# EAGLE board b4 (EAGLE 8.2.1)
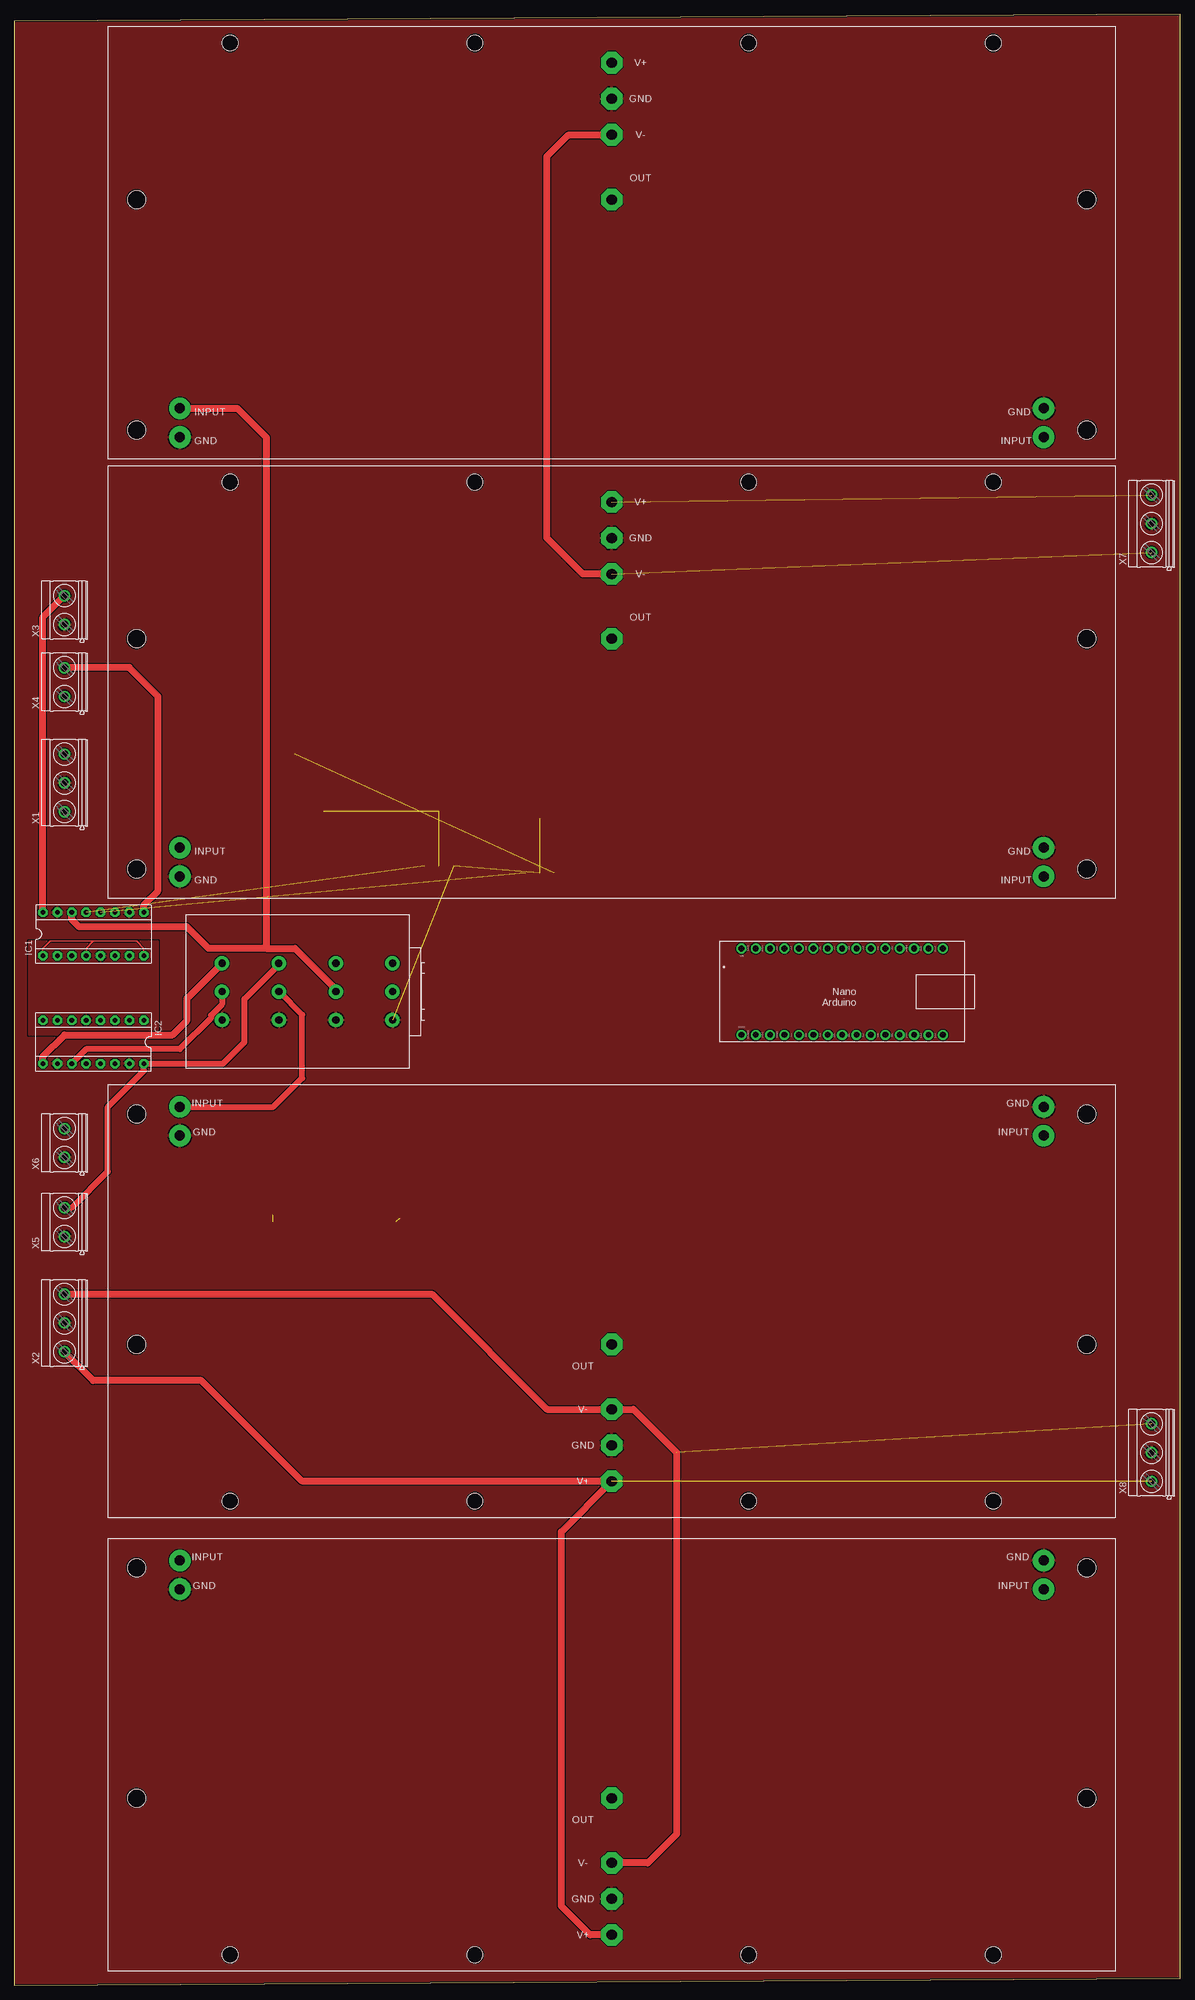
[diagram p0: board, top side]
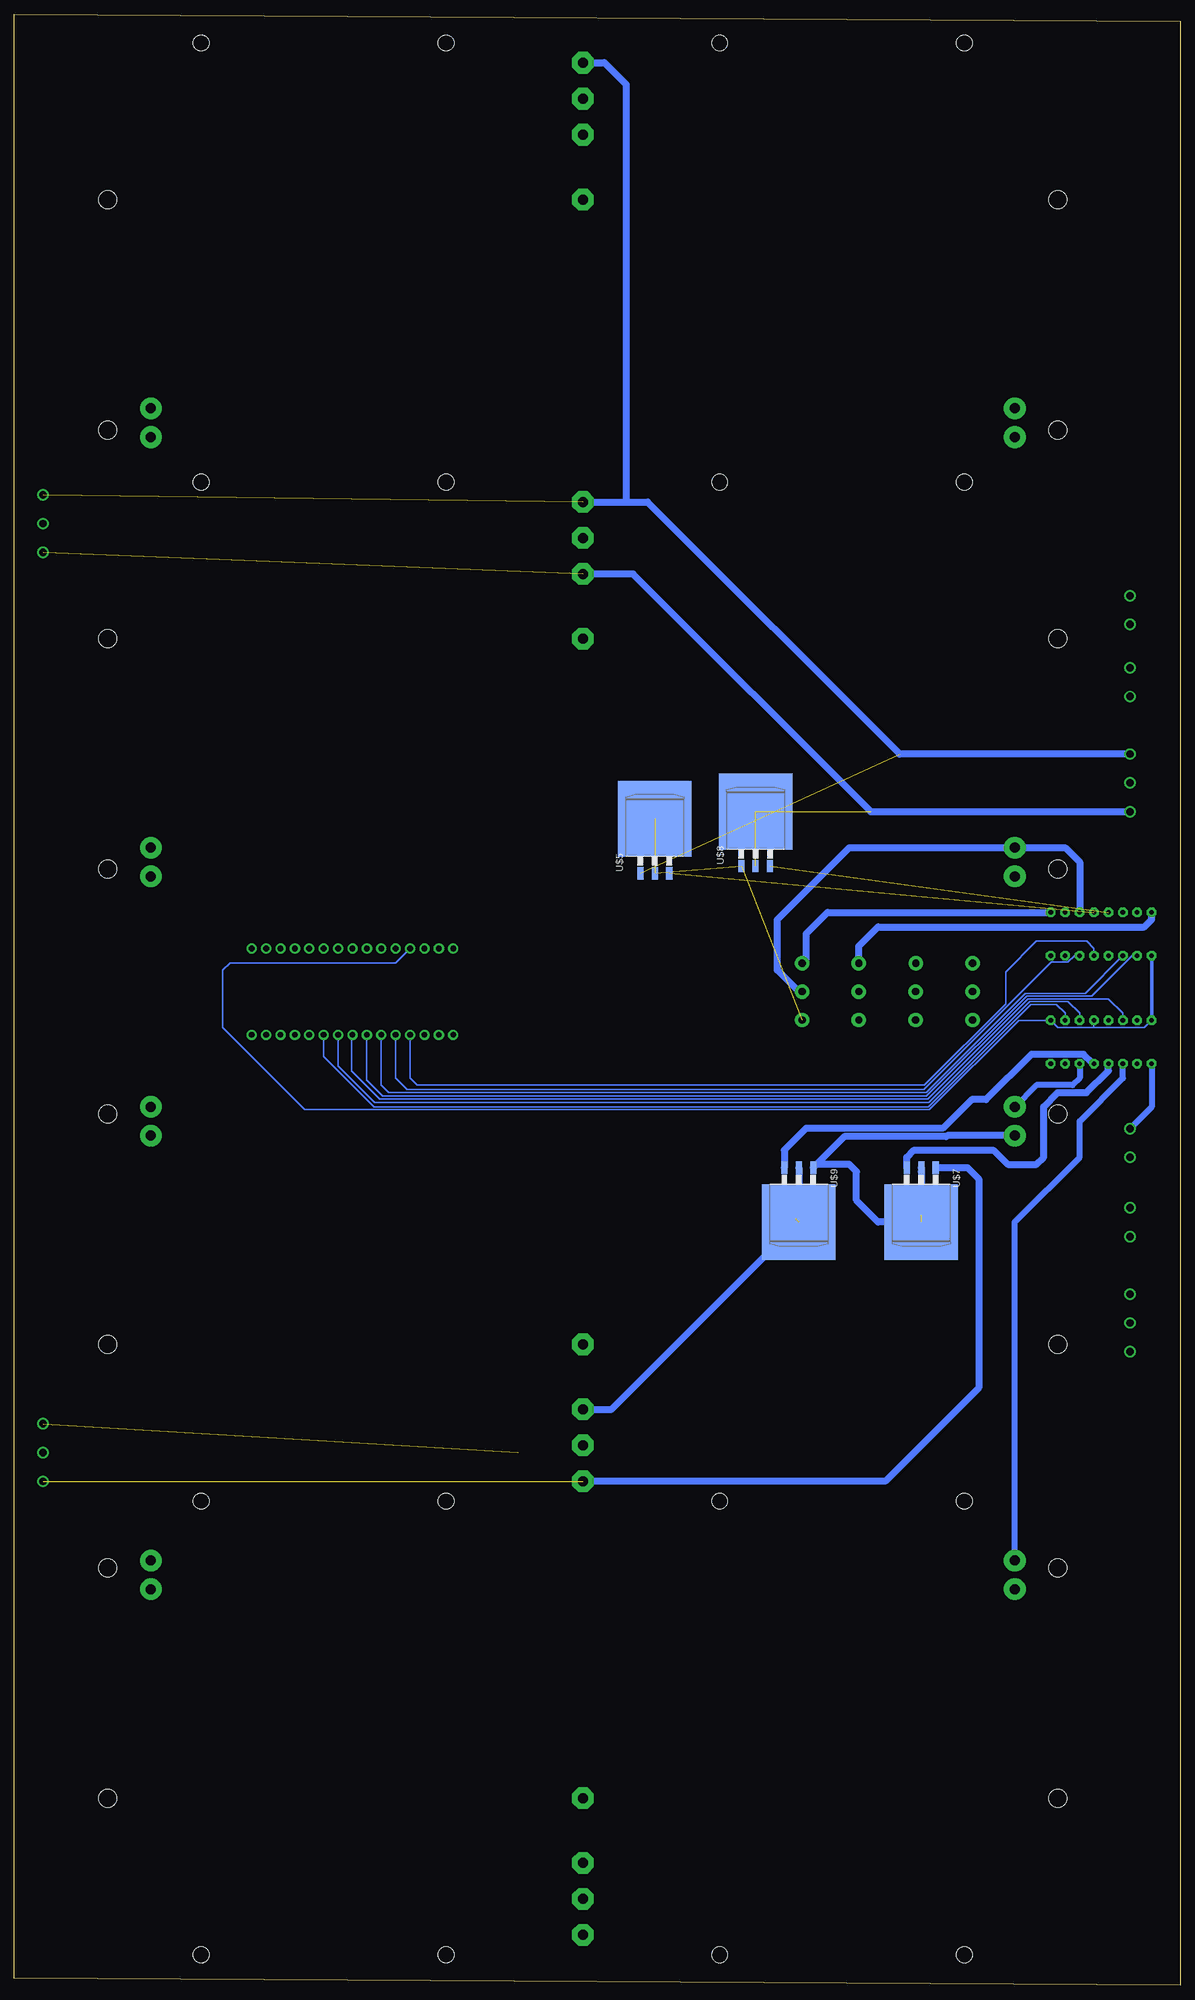
[diagram p1: board, bottom side, seen from below]

Size 205.72 x 347.65 mm. Coordinates in mm from the lower left corner, seen from the top.
Outline: 0,0 205.72,1.27 205.72,347.65 0,346.38 0,0
Copper layers (1*16): Top 0.035mm / dielectric 1.5mm / Bottom 0.035mm
Design rules "default": minimum track width 6mil, minimum drill 0.3mm, track to track 7mil, track to pad 7mil, pad to pad 7mil, via to via 7mil, smd to smd 7mil, copper to edge 8mil, drill to drill 8mil, minimum pad ring 6mil, minimum via ring 6mil, stop-mask expansion 4mil, vias tented up to drill 0mil, thermal gap 10mil

## Footprints (pad centres in the part's own frame; a part is rotated, then mirrored left to right if it is on the bottom)
DIL16 = drill 0.813 pad 1.676 octagon: 1 -8.89,-3.81; 2 -6.35,-3.81; 3 -3.81,-3.81; 4 -1.27,-3.81; 5 1.27,-3.81; 6 3.81,-3.81; 7 6.35,-3.81; 8 8.89,-3.81; 9 8.89,3.81; 10 6.35,3.81; 11 3.81,3.81; 12 1.27,3.81; 13 -1.27,3.81; 14 -3.81,3.81; 15 -6.35,3.81; 16 -8.89,3.81
ARDUINO_NANO = drill 1.016 pad 1.778: 3V3 6.35,1.27; 5V 31.75,1.27; A0 11.43,1.27; A1 13.97,1.27; A2 16.51,1.27; A3 19.05,1.27; A4 21.59,1.27; A5 24.13,1.27; A6 26.67,1.27; A7 29.21,1.27; D2 29.21,16.51; D3 26.67,16.51; D4 24.13,16.51; D5 21.59,16.51; D6 19.05,16.51; D7 16.51,16.51; D8 13.97,16.51; D9 11.43,16.51; D10 8.89,16.51; D11 6.35,16.51; D12 3.81,16.51; D13 3.81,1.27; GND 31.75,16.51; GND. 36.83,1.27; REF 8.89,1.27; RST 34.29,16.51; RST. 34.29,1.27; RX1 36.83,16.51; TX1 39.37,16.51; VIN 39.37,1.27
B22 = drill 1.778 pad 3.81 octagon: GND 88.9,63.5; OUT 88.9,45.72; V+ 88.9,69.85; V- 88.9,57.15 | drill 1.778 pad 3.81: GND1 12.7,3.81; GND2 165.1,8.89; IN1 12.7,8.89; IN2 165.1,3.81 | hole 3.2: 5.08,5.08; 172.72,5.08; 5.08,45.72; 172.72,45.72 | hole 2.8: 21.59,73.343; 64.77,73.343; 156.21,73.343; 113.03,73.343
TO263-3 = smd 1.067 x 2.159: 1 -2.54,-5.791; 2 0,-5.791; 3 2.54,-5.791 | smd 12.95 x 13.34: TAB 0,3.81
RK274 = drill 1.27 pad 2.54: G1 5,15.93; G2 5,5.93; G3 5,-4.103; G4 5,-14.136; I1 -5,15.93; I2 -5,5.93; I3 -5,-4.136; I4 -5,-14.136; O1 0,15.93; O2 0,5.93; O3 0,-4.103; O4 0,-14.136
MKDSN1,5/3-5,08 = drill 1.3 pad 2: 1 -7.641,0.025; 2 -2.561,0.025; 3 2.519,0.025
MKDSN1,5/2-5,08 = drill 1.3 pad 2: 1 -2.561,0.025; 2 2.519,0.025

## Placement (x,y rotation side)
IC1  PGA2311P  [DIL16]  13.97,185.42 0 top
IC2  PGA2311P  [DIL16]  13.97,166.37 180 top
PCB1  ARDUINO_NANO  [ARDUINO_NANO]  167.64,184.15 180 top
U$1  B22  [B22]  194.31,78.74 180 top
U$2  B22  [B22]  194.31,158.75 180 top
U$3  B22  [B22]  16.51,191.77 0 top
U$4  B22  [B22]  16.51,269.24 0 top
U$5  MC78XX  [TO263-3]  92.71,201.93 0 bottom
U$6  ALPSRK274  [RK274]  50.8,175.26 270 top
U$7  MC78XX  [TO263-3]  45.72,138.43 180 bottom
U$8  MC79XX  [TO263-3]  74.93,203.2 0 bottom
U$9  MC79XX  [TO263-3]  67.31,138.43 180 bottom
X1  MKDSN1,5/3-5,08  [MKDSN1,5/3-5,08]  8.89,214.63 90 top
X2  MKDSN1,5/3-5,08  [MKDSN1,5/3-5,08]  8.89,119.38 90 top
X3  MKDSN1,5/2-5,08  [MKDSN1,5/2-5,08]  8.89,242.57 90 top
X4  MKDSN1,5/2-5,08  [MKDSN1,5/2-5,08]  8.89,229.87 90 top
X5  MKDSN1,5/2-5,08  [MKDSN1,5/2-5,08]  8.89,134.62 90 top
X6  MKDSN1,5/2-5,08  [MKDSN1,5/2-5,08]  8.89,148.59 90 top
X7  MKDSN1,5/3-5,08  [MKDSN1,5/3-5,08]  200.66,260.35 90 top
X8  MKDSN1,5/3-5,08  [MKDSN1,5/3-5,08]  200.66,96.52 90 top

## Library data of the parts
IC1 IC2 U$1-U$5 U$7-U$9 = Vwvwbg
PCB1 = E14_Arduino_revB
U$6 = audio-pots
X1-X8 = con-phoenix-508

## Nets
DGND: IC1.5 IC2.5 PCB1.GND
GND: IC1.10 IC1.15 IC2.10 IC2.15 U$1.GND U$1.GND1 U$1.GND2 U$2.GND U$2.GND1 U$2.GND2 U$3.GND U$3.GND1 U$3.GND2 U$4.GND U$4.GND1 U$4.GND2 U$5.2 U$5.TAB U$6.G1 U$6.G2 U$6.G3 U$6.G4 U$7.2 U$7.TAB U$8.1 U$9.1 X1.2 X2.2 X3.1 X5.1 X6.1 X7.2 X8.2
N$1: U$3.V+ U$4.V+ U$5.1 X1.3 X7.3
N$2: U$3.V- U$4.V- U$8.2 U$8.TAB X1.1 X7.1
N$3: IC1.16 U$6.I2 X3.2
N$4: U$1.V+ U$2.V+ U$7.1 X2.1 X8.1
N$5: U$1.V- U$2.V- U$9.2 U$9.TAB X2.3 X8.3
N$6: IC1.14 U$4.IN1 U$6.O2
N$7: IC1.9 U$6.I1 X4.2
N$8: IC1.11 U$3.IN1 U$6.O1
N$9: IC2.14 U$2.IN2 U$6.O3
N$10: IC2.11 U$1.IN2 U$6.O4
N$11: IC2.9 U$6.I4 X6.2
N$12: IC1.2 PCB1.D4
N$14: IC2.16 U$6.I3 X5.2
N$15: IC1.3 PCB1.D3
N$16: IC2.2 PCB1.D7
N$17: IC2.3 PCB1.D6
N$18: IC1.1 IC1.4 IC1.8 IC2.1 IC2.4 IC2.8 PCB1.5V
N$19: IC2.13 U$9.3
N$20: IC2.6 PCB1.D5
N$21: IC1.6 PCB1.D2
N$22: IC2.12 U$7.3
N$23: IC1.12 U$5.3
N$25: IC1.13 U$8.3

## Tracks (layer width: path | path; a pad name or v marks a point on that pad's centre or on a via)
DGND
  Bottom 0.305: PCB1.GND 135.89,160.02 134.62,158.75 45.13,158.75 30.82,173.06 30.82,178.73 25.4,184.15 16.51,184.15 15.24,182.88 IC1.5
  pour Top: 3.81,184.15 25.4,184.15 25.4,167.64 2.54,167.64 2.54,184.15
GND  (4 unrouted)
  Bottom 1.27: 45.72,143.51 U$7.2 45.72,138.43 46.99,138.43 46.99,137.16 45.72,135.89 | U$2.GND2 41.13,149.86 41.31,149.68 59.31,149.68 U$9.1 64.21,144.78 58.42,144.78 57.15,143.51 57.15,138.43 53.34,134.62 U$7.TAB
  pour Top (rank 2): -17.78,363.22 232.41,363.22 232.41,-12.7 -17.78,-12.7
N$1  (2 unrouted)
  Bottom 1.27: X1.3 49.51,217.15 93.98,261.62 97.79,261.62 | U$3.V+ 97.79,261.62 | U$4.V+ 101.6,339.09 97.79,335.28 97.79,261.62
N$2  (3 unrouted)
  Top 1.27: U$3.V- 100.33,248.92 93.98,255.27 93.98,322.58 97.79,326.39 U$4.V-
  Bottom 1.27: U$3.V- 96.52,248.92 54.61,207.01 8.89,207.01 X1.1
N$3
  Top 1.27: IC1.16 5.08,241.3 X3.2
  Bottom 1.27: U$6.I2 56.73,183.3 53.34,186.69 6.35,186.69 5.08,187.96 IC1.16
N$4  (1 unrouted)
  Top 1.27: X2.1 13.92,106.68 33.02,106.68 50.8,88.9 U$2.V+ 96.52,80.01 96.52,13.97 101.6,8.89 U$1.V+
  Bottom 1.27: U$7.1 37.54,144.22 35.56,142.24 35.56,105.41 52.07,88.9 U$2.V+
N$5  (2 unrouted)
  Top 1.27: U$1.V- 111.76,21.59 116.84,26.67 116.84,93.98 109.22,101.6 U$2.V- 93.98,101.6 73.68,121.9 X2.3
  Bottom 1.27: U$2.V- 100.33,101.6 72.39,129.54 72.39,130.81 67.95,135.26 | 67.95,135.26 67.31,135.89 | U$9.2 67.31,135.89 | 67.31,135.89 67.95,135.26
N$6
  Top 1.27: U$6.O2 56.73,175.68 49.53,182.88 44.45,182.88 | 44.45,182.88 34.29,182.88 30.48,186.69 11.43,186.69 10.16,187.96 IC1.14 | U$4.IN1 39.37,278.13 44.45,273.05 44.45,182.88
N$7
  Top 1.27: IC1.9 22.86,190.5 25.4,193.04 25.4,227.33 20.32,232.41 8.89,232.41 X4.2
  Bottom 1.27: IC1.9 62.23,189.23 66.04,185.42 66.04,180.95 U$6.I1
N$8
  Bottom 1.27: IC1.11 17.78,198.12 20.32,200.66 U$3.IN1 58.42,200.66 71.12,187.96 71.12,179.07 67.31,175.26 U$6.O1
N$9
  Top 1.016: U$2.IN2 45.72,154.94 50.8,160.02 50.8,171.16 U$6.O3
  Bottom 1.016: IC2.14 17.78,160.02 19.05,158.75 25.4,158.75 U$2.IN2
N$10
  Top 1.016: U$6.O4 36.66,173.03 34.71,171.07 34.71,170.6 29.21,165.1 12.7,165.1 IC2.11
  Bottom 1.016: U$1.IN2 29.21,134.62 17.78,146.05 17.78,152.4 10.16,160.02 IC2.11
N$11
  Top 1.27: IC2.9 5.08,163.83 8.89,167.64 27.94,167.64 30.48,170.18 30.48,174.08 U$6.I4
  Bottom 1.016: IC2.9 5.08,154.89 X6.2
N$12
  Bottom 0.305: PCB1.D4 143.51,159.64 140.69,156.82 44.78,156.82 27.12,174.47 15.64,174.47 8.51,181.61 IC1.2
N$14
  Top 1.016: X5.2 10.14,137.14 16.51,143.51 16.51,154.94 22.86,161.29 IC2.16 36.83,162.56 40.64,166.37 40.64,173.99 46.99,180.34 46.74,180.34 U$6.I3
N$15
  Bottom 0.305: PCB1.D3 140.97,158.75 139.7,157.48 44.8,157.48 27.32,174.96 16.82,174.96 IC1.3
N$16
  Bottom 0.305: IC2.2 20.32,171.45 21.89,173.03 26.36,173.03 44.45,154.94 142.24,154.94 151.13,163.83 PCB1.D7
N$17
  Bottom 0.305: IC2.3 17.78,171.45 19.84,173.51 26.57,173.51 44.37,155.7 142.11,155.7 148.59,162.18 PCB1.D6
N$18
  Top 0.305: IC1.4 12.7,182.88 13.97,184.15 | 13.97,184.15 21.59,184.15 22.86,182.88 IC1.8 | 13.97,184.15 6.35,184.15 5.08,182.88 IC1.1
  Bottom 0.305: PCB1.5V 138.43,180.34 167.64,180.34 168.91,179.07 168.91,168.91 154.46,154.46 44.25,154.46 28.53,170.18 IC2.1 21.59,168.91 15.24,168.91 | IC2.8 6.35,168.91 15.24,168.91 | IC2.4 15.24,168.91
  Bottom 0.61: IC2.8 IC1.1
N$19
  Bottom 1.27: IC2.13 15.45,162.56 17.1,164.21 26.29,164.21 34.29,156.21 36.83,156.21 41.91,151.13 66.04,151.13 69.85,147.32 U$9.3
N$20
  Bottom 0.305: IC2.6 10.16,171.45 12.7,173.99 26.92,173.99 44.58,156.34 141.22,156.34 146.18,161.29 146.18,167.51 PCB1.D5
N$21
  Bottom 0.305: IC1.6 18.67,181.61 19.84,180.44 22.76,180.44 45.24,157.96 136.37,157.96 138.43,160.02 PCB1.D2
N$22
  Bottom 1.27: U$7.3 48.26,146.05 46.99,147.32 33.02,147.32 30.48,144.78 25.4,144.78 24.13,146.05 24.13,154.94 21.64,157.43 16.56,157.43 12.7,161.29 IC2.12
N$23  (1 unrouted)
N$25  (1 unrouted)